# Altium PCB Decector1x4.PcbDoc
Units mil, origin at the board's own origin, x right, y up, seen from the top; angles counter-clockwise.
Board outline 4080 x 2615 mil, 2 copper layers (Top Layer, Bottom Layer); 16 components, 15 nets, 64 pads, 2 vias.
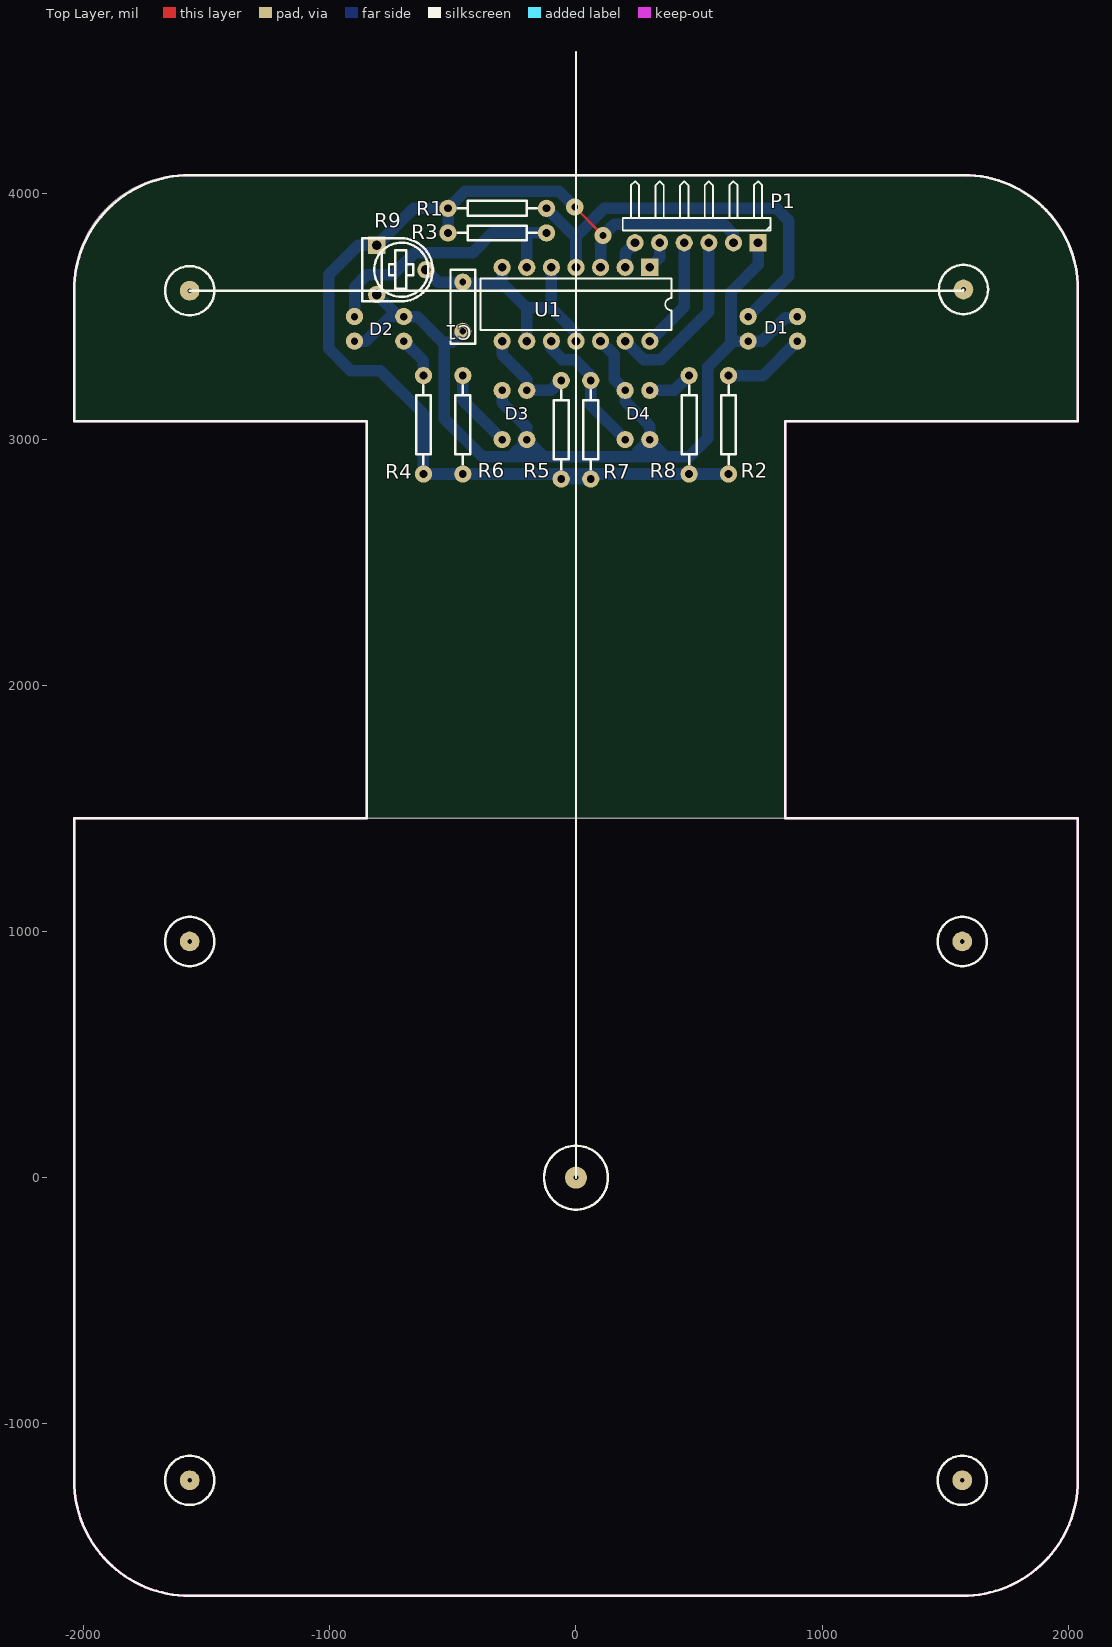
[diagram p0: Top Layer view]
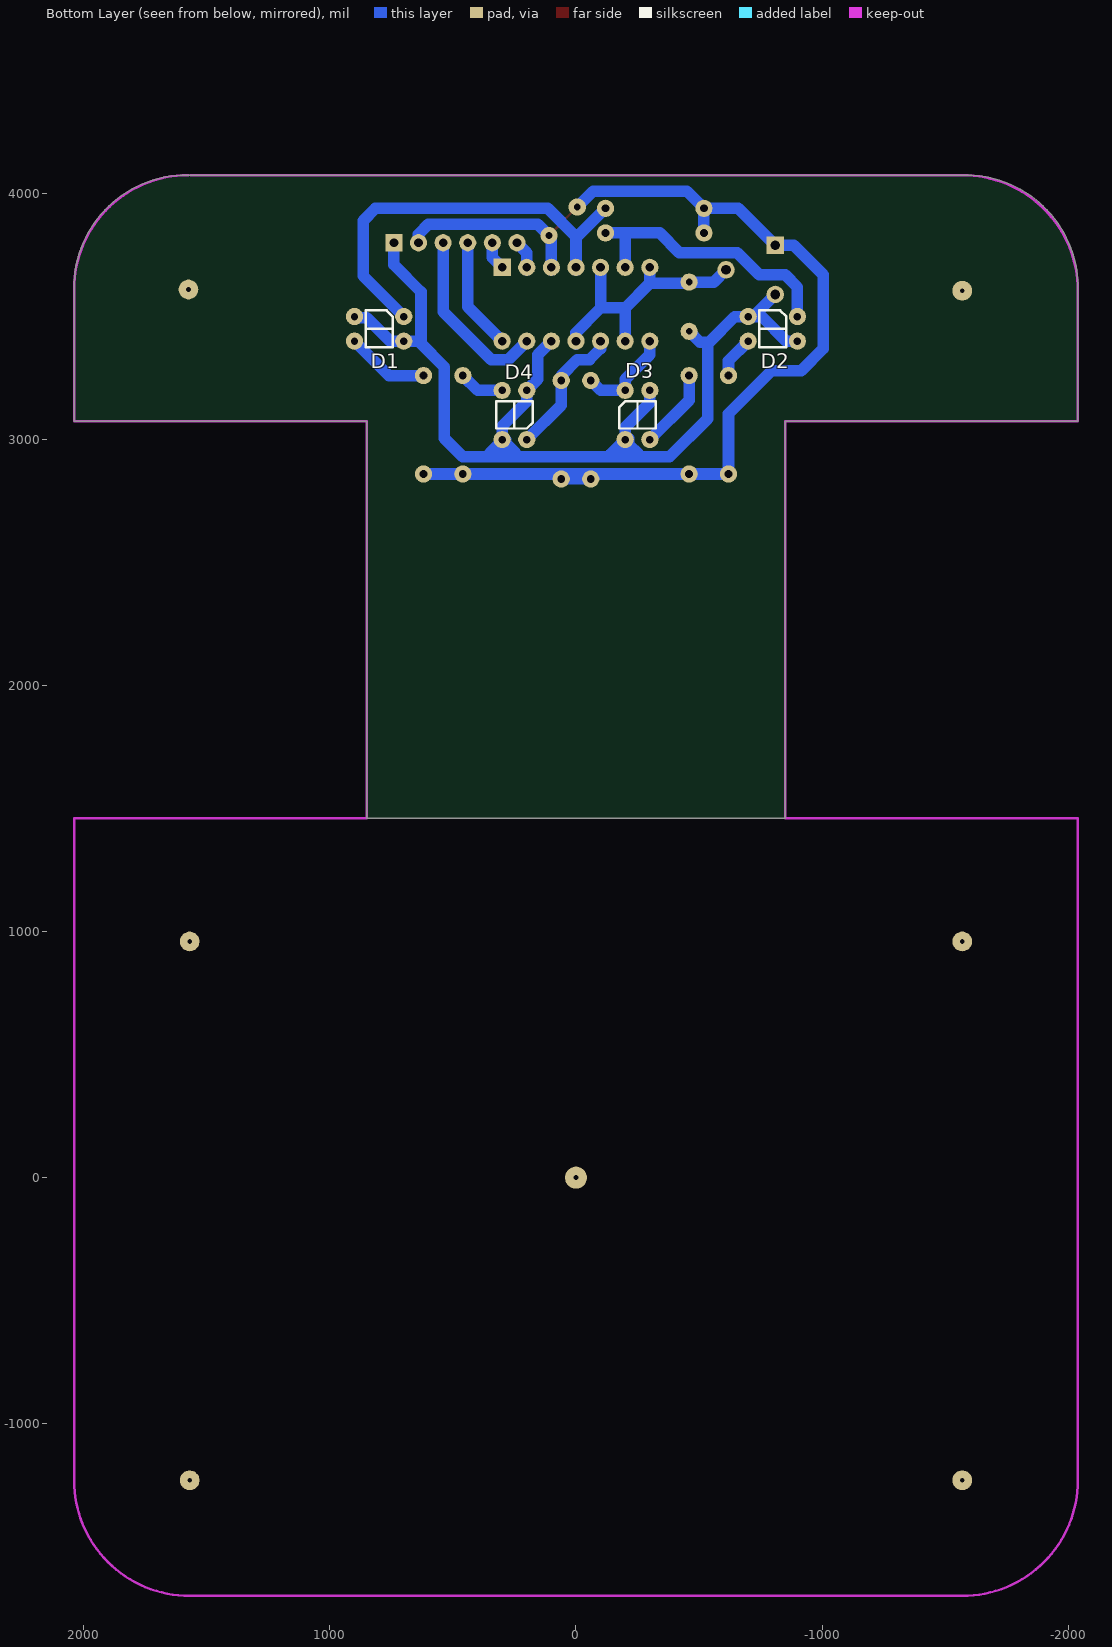
[diagram p1: Bottom Layer view, seen from below]

## Layer stack, top to bottom
Top Layer: signal copper 1.4
Dielectric: dielectric 12.6, FR-4, Dk 4.8
Bottom Layer: signal copper 1.4

## Board outline
-850,1460 -850,3075 -2040,3075 -2040,3620 cw(c-1585,3620) -1585,4075 1585,4075 cw(c1585,3620) 2040,3620 2040,3075 850,3075 850,1460

## Design rules (kind name [scope] priority, off if disabled: settings)
Clearance [All] p1: gap=10
ComponentClearance [All] p1: gap=10 collisioncheckmode=3 verticalgap=10
PolygonConnect [All] p1: connectstyle=Relief reliefconductorwidth=10 reliefentries=4 polygonreliefangle="90 Angle"
RoutingVias [All] p1: holewidth=28 width=50 viastyle="Through Hole" minholewidth=28 minwidth=50 maxholewidth=28 maxwidth=50
SolderMaskExpansion [All] p1: expansion=4
TestPointUsage [All] p1: valid=0 allowmultiple=FALSE
Testpoint [All] p1: side=15 testpointundercomponent=TRUE minsize=40 maxsize=100 preferedsize=60 minholesize=0 maxholesize=40 preferedholesize=32 testpointgrid=1 style=1023 order=0123456789
Width [All] p1: maxlimit=75 minlimit=10 preferedwidth=10 toplayer_maxwidth=10 bottomlayer_prefwidth=47 minimp=50.000000 maximp=50.000000 favimp=50.000000
17 further rules are at their usual default settings.

## Components (designator, comment, footprint, x,y, rotation, side; value= is the part's Value field where it differs from the comment)
C1 "CAP" C0.2X0.3 -460,3640 r270 top
D1 "SPI-315" photodevice 700,3500 r0 bottom locked
D2 "SPI-315" photodevice -900,3500 r0 bottom locked
D3 "SPI-315" photodevice -200,3200 r270 bottom locked
D4 "SPI-315" photodevice 200,3000 r90 bottom locked
P1 "Header 6H" HDR1X6H 740,3800 r180 top
R1 "200" AXIAL0.4 -120,3940 r180 top
R2 "51K" AXIAL0.4 620,3260 r270 top
R3 "200" AXIAL0.4 -120,3840 r180 top
R4 "51K" AXIAL0.4 -620,3260 r270 top
R5 "200" AXIAL0.4 -60,3240 r270 top
R6 "51K" AXIAL0.4 -460,3260 r270 top
R7 "200" AXIAL0.4 60,3240 r270 top
R8 "51K" AXIAL0.4 460,3260 r270 top
R9 "RP1" RP_05 -810,3790 r270 top
U1 "LM339N" N14A 0,3550 r180 top

## Footprints (in the part's own frame and the unit in brackets; to place one, negate y for a bottom-side part, rotate by r counter-clockwise, add the part's x,y. Pads: shape width x height; smd on the part's side, far side on the other; paste and mask are expansions set on the pad)
AXIAL0.4 [mil]
  round 70 hole 32 unplated: 1(0,0) 2(400,0)
  silkscreen extent 40,-30 360,30
C0.2X0.3 [mil]
  round 70 hole 27.56: 1(0,0) 2(200,0)
  silkscreen extent -50,-50 250,50
HDR1X6H [mil] "Connector; Header; 6 Position; Right Angle"
  rect 70x70 hole 35.43 unplated: 1(0,0)
  round 70 hole 35.43 unplated: 2(100,0) 3(200,0) 4(300,0) 5(400,0) 6(500,0)
  silkscreen extent -50,-250 550,-50
N14A [mil] "DIP; 14 Leads; Row Spacing 7.62 mm; Pitch 2.54 mm"
  rect 70x70 hole 35.43 unplated: 1(-300,-150)
  round 70 hole 35.43 unplated: 2(-200,-150) 3(-100,-150) 4(0,-150) 5(100,-150) 6(200,-150) 7(300,-150) 8(300,150) 9(200,150) 10(100,150) 11(0,150) 12(-100,150) 13(-200,150) 14(-300,150)
  silkscreen extent -388,-104 388,104
photodevice [mil]
  round 70 hole 30: 1(0,0) 2(200,0) 3(200,100) 4(0,100)
  silkscreen extent 45,-25 155,125
RP_05 [mm]
  rect 1.8x1.8 hole 1: 1(0,0)
  round 1.8 hole 1: 2(2.54,5.08) 3(5.08,0)
  silkscreen extent -0.71,-1.5 5.79,5.79

## Part data
D1 D2 D3 D4: library part PHOTOISO3
P1: "Header, 6-Pin, Right Angle"
R1 R2 R3 R4 R5 R6 R7 R8: library part R1
R9: "Potentiometer"
U1: "Low-Power Low Offset Voltage Quad Comparators"

## Free pads (board coordinates)
  round 80 hole 20: 0(-1570,-1230) 0(-1570,960) 0(-1570,3605) 0(1570,-1230) 0(1570,960) 0(1575,3610)
  round 90 hole 20: 0(0,0)

## Via types
v1: diameter 70, hole 28, Top Layer to Bottom Layer, 2 vias

## Nets (pads, with @x,y where several pads share a name; then routed paths per layer and width w, separated by ;. In a path a pad name is that pad's centre, name@x,y a point inside that pad or via, vN(x,y) a via of type N, cw(c..) or ccw(c..) an arc to the next point about the centre after c; other vN are vias at no path point)
GND: C1.2 D1.2 D1.4 D2.2 D2.4 D3.2 D3.4 D4.2 D4.4 P1.1 R9.3 U1.12 | length 4493.4
  Bottom Layer w47: D2.4 -855,3400 -755,3500 -645,3500 -541.02,3396.02 -503.98,3396.02 C1.2 ; R9.3 D2.2@-720,3500 ; -535,3396.02 -535,3085 -380,2930 460,2930 535,3005 535,3295 632.95,3392.95 630,3395.91 630,3600 740,3710 P1.1 ; D3.4 -300,3150 -200,3050 -200,2995 D3.2@-195,2990 ; -255,2940 -215,2980 D3.2@-215,3005 ; -195,2930 D3.2@-195,2990 ; -140,2940 -190,2990 D3.2@-195,2990 ; U1.12 155,3345 155,3245 D4.2 200,3155 300,3055 D4.4 ; 250,2950 285,2985 D4.4@285,3000 ; 260,2930 D4.4@300,2970 ; D4.4@310,3000 310,2985 350,2945 ; 630,3410 640,3400 755,3400 850,3495 900,3495 D1.2
NetD1_1: D1.1 R1.1 U1.4 | length 1706.5
  Bottom Layer w31: U1.4@0,3680 U1.4
  Bottom Layer w47: R1.1 0,3820 ; U1.4 0,3825 115,3940 815,3940 865.11,3889.89 865.11,3665.11 D1.1
NetD1_3: D1.3 R2.1 | length 338
  Bottom Layer w47: R2.1 760,3260 D1.3
NetD2_1: D2.1 R3.1 U1.6 | length 1131.1
  Bottom Layer w47: D2.1 -900,3620 -850,3670 -745,3670 -655,3760 -420,3760 -340,3840 R3.1 ; U1.6 -200,3840
NetD2_3: D2.3 R4.1 | length 173.1
  Bottom Layer w47: D2.3 -620,3320 R4.1
NetD3_1: D3.1 R5.1 U1.8 | length 398
  Bottom Layer w47: U1.8 -300,3345 -200,3245 D3.1 -100,3200 R5.1
NetD3_3: D3.3 R6.1 | length 326.3
  Bottom Layer w47: R6.1 -460,3160 D3.3
NetD4_1: D4.1 R7.1 U1.10 | length 533.6
  Bottom Layer w47: U1.10 -100,3370 -55.22,3325.22 -5.22,3325.22 R7.1@60,3260 ; R7.1 60,3140 D4.1
NetD4_3: D4.3 R8.1 | length 184.9
  Bottom Layer w47: D4.3 400,3200 R8.1
OUT1: P1.6 U1.2 | length 136.6
  Bottom Layer w31: U1.2@200,3680 U1.2
  Bottom Layer w47: U1.2 200,3760 P1.6
OUT2: P1.5 U1.1 | length 136.6
  Bottom Layer w31: U1.1@300,3680 U1.1
  Bottom Layer w47: U1.1 340,3740 P1.5
OUT3: P1.4 U1.14 | length 458
  Bottom Layer w47: U1.14 440,3540 P1.4
OUT4: P1.3 U1.13 | length 731.8
  Bottom Layer w47: U1.13 275,3325 345,3325 540,3520 P1.3
VCC: P1.2 R1.2 R2.2 R3.2 R4.2 R5.2 R6.2 R7.2 R8.2 R9.1 U1.3 | length 4588.1
  Top Layer w10: v1(-5,3945) v1(110,3830)
  Bottom Layer w31: U1.3@100,3680 U1.3@105,3685
  Bottom Layer w47: R4.2 -620,3105 -795,3280 -915,3280 -1005,3370 -1005,3670 -885,3790 R9.1 -660,3940 R1.2 ; R4.2@-600,2860 R2.2@600,2860 ; R3.2 R1.2 ; R5.2@-80,2860 R5.2 R7.2 R7.2@80,2860 ; v1(-5,3945) -70,4010 -450,4010 R1.2 ; U1.3 100,3820 155,3875 600,3875 640,3835 P1.2
VS: C1.1 R9.2 U1.5 U1.7 U1.9 U1.11 | length 1374.1
  Bottom Layer w31: -200,3530 -105,3530 U1.11@0,3425 ; U1.11@0,3380 U1.11
  Bottom Layer w47: R9.2 -560,3640 C1.1 -455,3635 -300,3635 ; U1.7 -300,3635 ; U1.9 -200,3530 ; U1.5 -100,3535 ; U1.11 0,3435 -100,3535 ; -300,3635 -200,3535 -100,3535

## Keep-outs
Keep-Out Layer:
  lines w10: 1565,4075 -1570,4075 ccw(c-1570,3605) -2040,3605 -2040,3075 -850,3075 -850,2945 -850,1460 -2040,1460 -2040,-1230 ccw(c-1570,-1230) -1570,-1700 1570,-1700 ccw(c1570,-1230) 2040,-1230 2040,1460 1775,1460 850,1460 850,3075 1375,3075 2040,3075 2040,3610 ; 2040,3620 2040,3625 ; 2040,3610 ccw(c1575,3610) 1575,4075 cw(c1575,3610) 2040,3610

## Silkscreen, mask and mechanical layers (free items; w line width, h text height)
Top Overlay:
  circle w10: c-1570,960 r100
  circle w10: c1570,960 r100
  circle w10: c-1570,3605 r100
  circle w10: c1575,3610 r100
  circle w10: c1570,-1230 r100
  circle w10: c-1570,-1230 r100
  circle w10: c0,0 r130
  lines w10: -1570,3605 1575,3605 1575,3610 ; 0,0 0,4575 ; 2005,3075 2040,3075 ; 2040,3075 2040,3610 ccw(c1575,3610) 1575,4075 -1570,4075 ccw(c-1570,3605) -2040,3605 -2040,3075 -1140,3075 -850,3075 -850,1575 -850,1460 -2040,1460 -2040,-1230 ccw(c-1570,-1230) -1570,-1700 1570,-1700 ccw(c1570,-1230) 2040,-1230 2040,1460 850,1460 850,3075 1240,3075 2040,3075
  text "D1" at 765,3430 h50
  text "D2" at -840,3425 h50
  text "D3" at -290,3080 h50
  text "D4" at 205,3080 h50